# Altium PCB 红外接收模块.PcbDoc
Units mm, origin at the board's own origin, x right, y up, seen from the top; angles counter-clockwise.
Board outline 29.97 x 29.97 mm, 2 copper layers (Top Layer, Bottom Layer); 8 components, 5 nets, 20 pads, 2 vias.
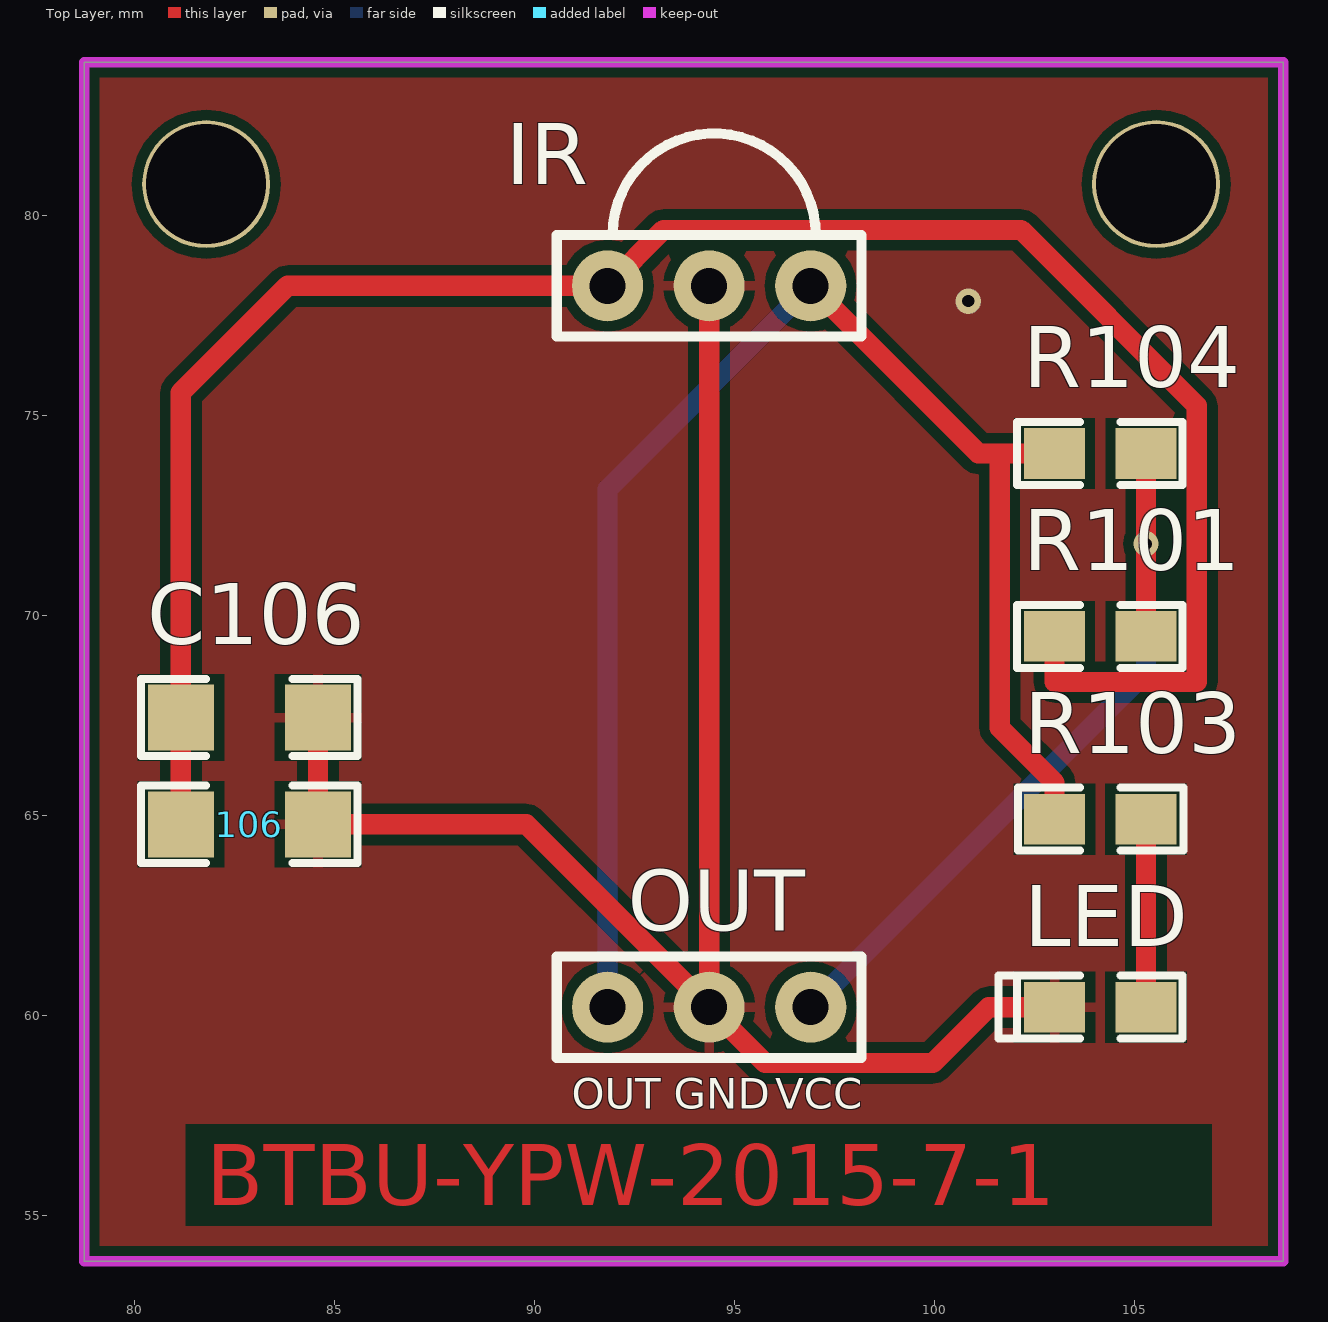
[diagram p0: Top Layer view]
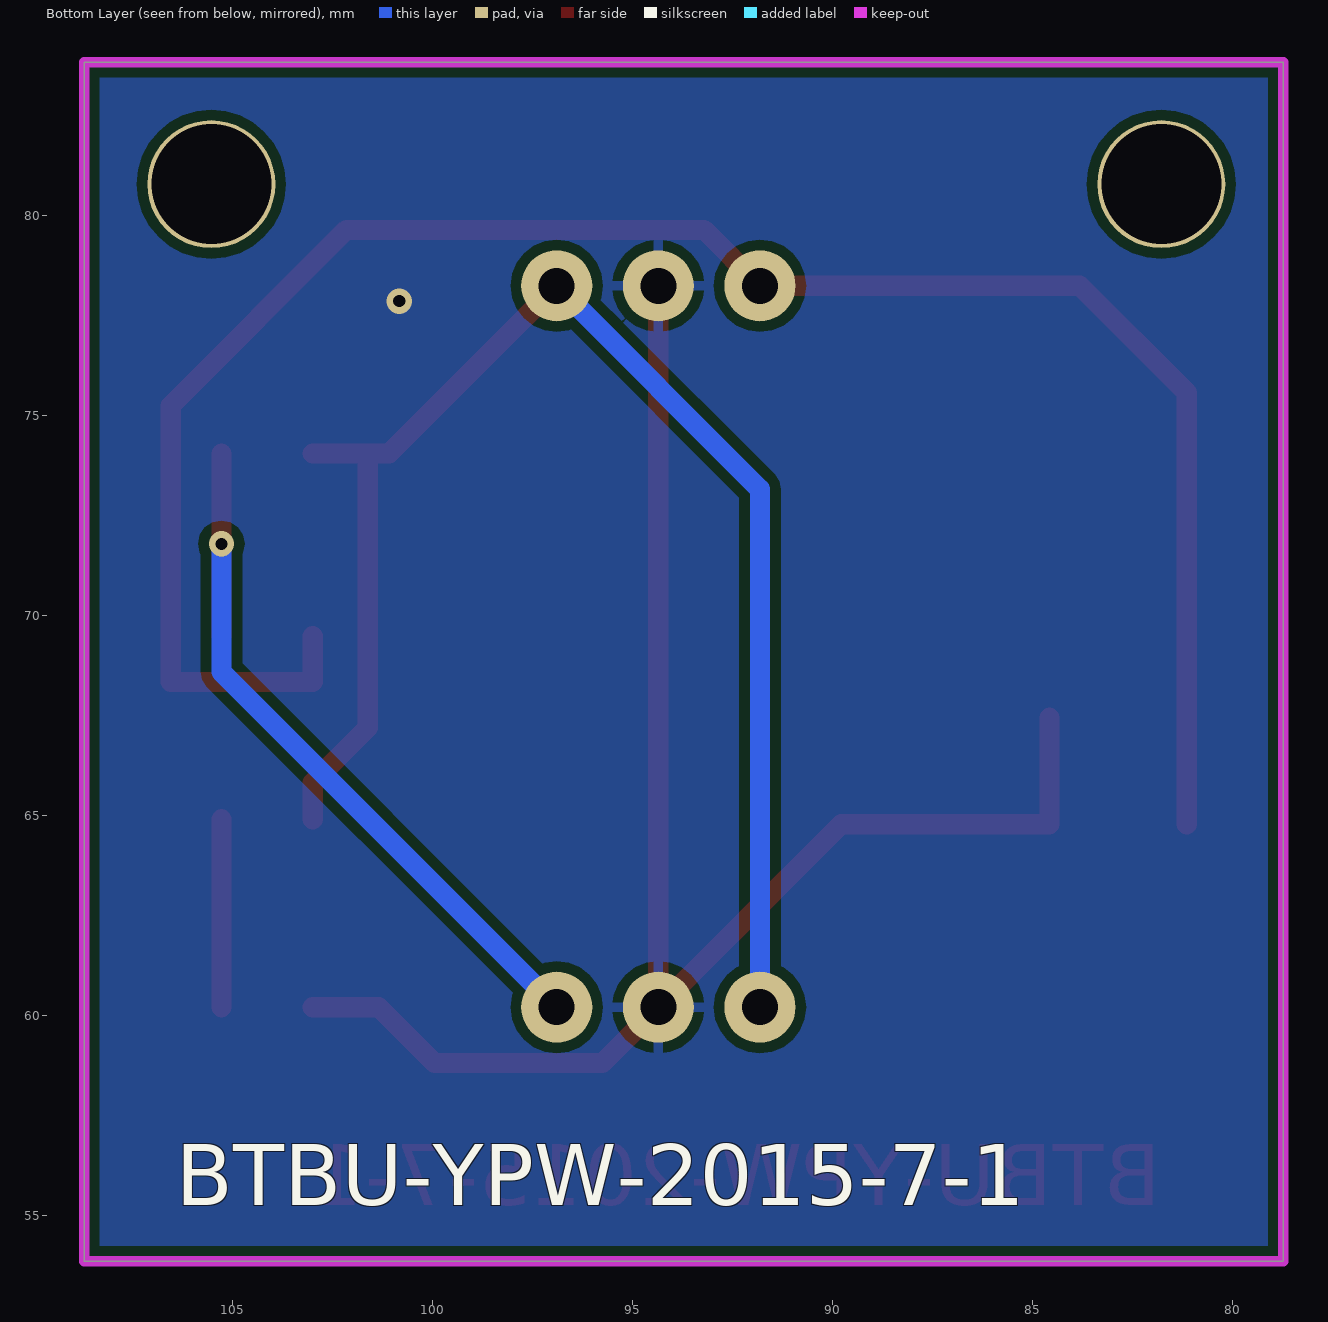
[diagram p1: Bottom Layer view, seen from below]
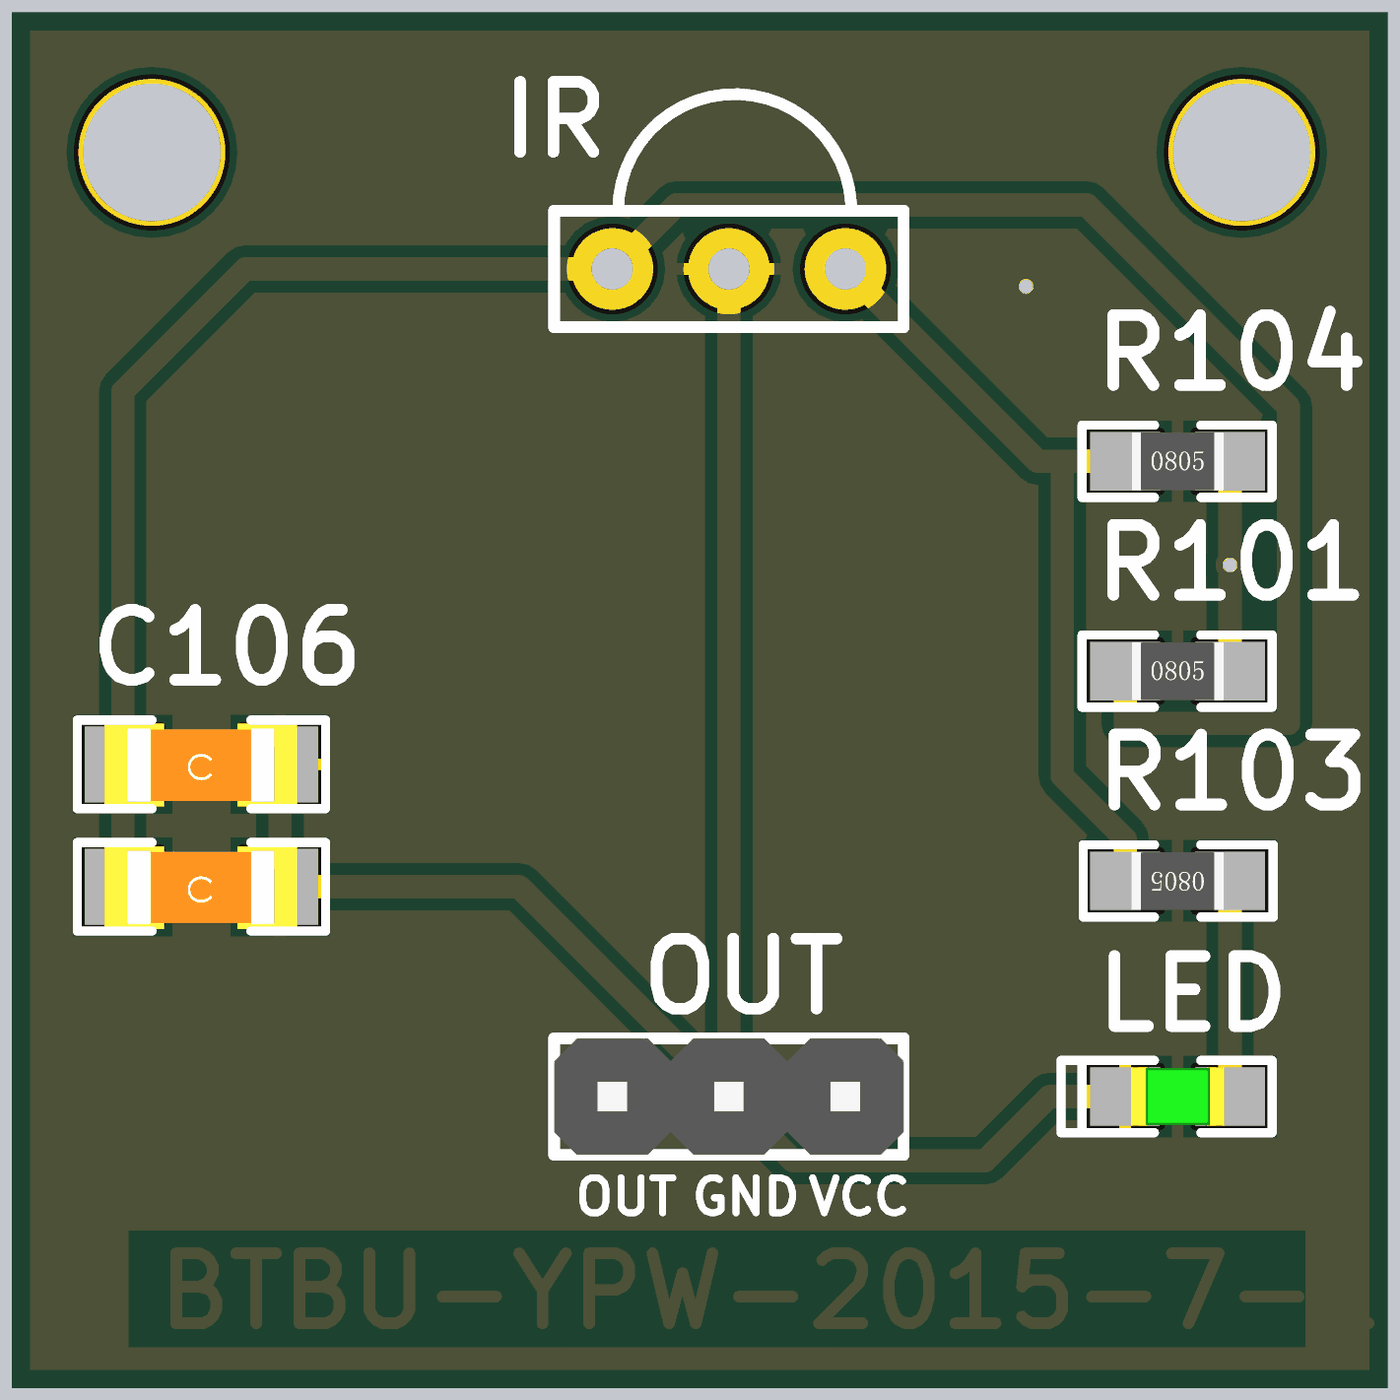
[diagram p2: 3D render of the assembled board from above, using the file's embedded part models]

## Layer stack, top to bottom
Top Solder: solder mask 0.0102, Solder Resist, Dk 3.5
Top Layer: signal copper 0.0356
Dielectric 1: dielectric 0.32, FR-4, Dk 4.8
Bottom Layer: signal copper 0.0356
Bottom Solder: solder mask 0.0102, Solder Resist, Dk 3.5

## Board outline
78.74,53.848 108.712,53.848 108.712,83.82 78.74,83.82

## Design rules (kind name [scope] priority, off if disabled: settings)
Clearance [All] p1: gap=0.254
PolygonConnect [All] p1: connectstyle=Relief reliefconductorwidth=0.254 reliefentries=4 polygonreliefangle="90 Angle" airgapwidth=0.254
RoutingVias [All] p1: holewidth=0.305 width=0.635 viastyle="Through Hole" minholewidth=0.305 minwidth=0.635 maxholewidth=0.305 maxwidth=0.635
SMDNeckDown [All] p1: percent=50.000
SolderMaskExpansion [All] p1: expansion=0.102
Width [All] p1: maxlimit=0.508 minlimit=0.508 preferedwidth=0.508
30 further rules are at their usual default settings.

## Components (designator, comment, footprint, x,y, rotation, side; value= is the part's Value field where it differs from the comment)
106 "Comment" 1206 81.153,64.77 r0 top
C106 "Comment" 1206 81.153,67.437 r0 top
IR "Comment" 红外接收头 91.313,82.169 r270 top
LED "Comment" D0805 105.283,60.198 r180 top
OUT "Comment" 3Pin 91.821,60.198 r0 top
R101 "Comment" 0805 105.283,69.469 r0 top
R103 "Comment" 0805 102.997,64.897 r180 top
R104 "Comment" 0805 105.283,74.041 r0 top

## Footprints (in the part's own frame and the unit in brackets; to place one, negate y for a bottom-side part, rotate by r counter-clockwise, add the part's x,y. Pads: shape width x height; smd on the part's side, far side on the other; paste and mask are expansions set on the pad)
3Pin [mil] "红外接收"
  round 70 hole 35.43: GND(100,0) OUT(0,0) VCC(200,0)
  silkscreen extent -50,-50 250,50, body extent -50,-50 250,50, height 336
0805 [mil]
  rect 60x50 smd: 1(0,0) 2(-90,0)
  silkscreen extent -127,-31 36,31, body extent -84,-25 -6,25, height 22
1206 [mil]
  rect 65x65 smd: 1(0,0) 2(135,0)
  silkscreen extent -39,-38 174,38, body extent -16,-36 150,35, height 37
D0805 [mil]
  rect 60x50 smd: +(0,0) GND(90,0)
  silkscreen extent -36,-31 145,31, body extent 5,-25 85,25, height 43
红外接收头 [mil]
  round 70 hole 35.43: GND(155,120) OUT(155,220) VCC(155,20)
  silkscreen extent 5,-30 205,270, body extent 94,-85 306,314, height 787

## Free pads (board coordinates)
  round 3.2 hole 3: 0(81.788,80.772) 0(105.537,80.772)

## Via types
v1: diameter 0.635, hole 0.305, Top Layer to Bottom Layer, tented both sides, 2 vias

## Nets (pads, with @x,y where several pads share a name; then routed paths per layer and width w, separated by ;. In a path a pad name is that pad's centre, name@x,y a point inside that pad or via, vN(x,y) a via of type N, cw(c..) or ccw(c..) an arc to the next point about the centre after c; other vN are vias at no path point)
GND: 106.2 C106.2 IR.GND LED.GND OUT.GND | length 42.2
  Top Layer w0.508: C106.2 106.2 89.789,64.77 OUT.GND ; IR.GND OUT.GND ; LED.GND 101.346,60.198 99.949,58.801 95.758,58.801 OUT.GND
  other v1: 100.838,77.851
IR-VCC: 106.1 C106.1 IR.VCC R101.2 | length 51.3
  Top Layer w0.508: 106.1 C106.1 81.153,75.565 83.82,78.232 IR.VCC 93.218,79.629 102.159,79.629 106.553,75.235 106.553,68.326 102.997,68.326 R101.2
LED-OUT: LED.+ R103.2 | length 4.7
  Top Layer w0.508: LED.+ R103.2
OUT: IR.OUT OUT.OUT R103.1 R104.2 | length 37.7
  Top Layer w0.508: IR.OUT 101.092,74.041 101.625,74.041 ; R103.1 102.997,65.811 101.625,67.183 101.625,74.041 ; R104.2 101.625,74.041
  Bottom Layer w0.508: OUT.OUT 91.821,73.152 IR.OUT
VCC: OUT.VCC R101.1 R104.1 | length 19.6
  Top Layer w0.508: R101.1 v1(105.283,71.78) R104.1
  Bottom Layer w0.508: OUT.VCC 105.283,68.58 v1(105.283,71.78)

## Polygon pours and split planes (outlines as drawn)
GND on Top Layer "VCC-No Net" (solid, pour order 2): 78.754,83.809 108.726,83.809 108.726,53.837 78.754,53.837
GND on Bottom Layer "VCC-No Net" (solid, remove dead copper, pour order 6): 78.752,83.802 78.752,53.83 108.724,53.83 108.724,83.802

## Keep-outs
Keep-Out Layer:
  the board outline again, w0.254

## Other copper
Top Layer:
  text "BTBU-YPW-2015-7-1" at 81.788,55.245 h1.52

## Silkscreen, mask and mechanical layers (free items; w line width, h text height)
Bottom Overlay:
  text "BTBU-YPW-2015-7-1" at 106.426,55.245 h1.52

## Text inside footprints (layer, text, board x,y; h text height)
OUT: Top Overlay "VCC" at 96.012,57.658 h0.76; Top Overlay "GND" at 93.472,57.658 h0.76